# Altium PCB AX301_AX4010.PcbDoc (part 7 of 10)
Units mm, origin at the board's own origin, x right, y up, seen from the top; angles counter-clockwise.
Board outline 131.7 x 91.8 mm, 4 copper layers (Top Layer, GND, Mid-Layer 1, Bottom Layer); 191 components, 338 nets, 1108 pads, 420 vias.
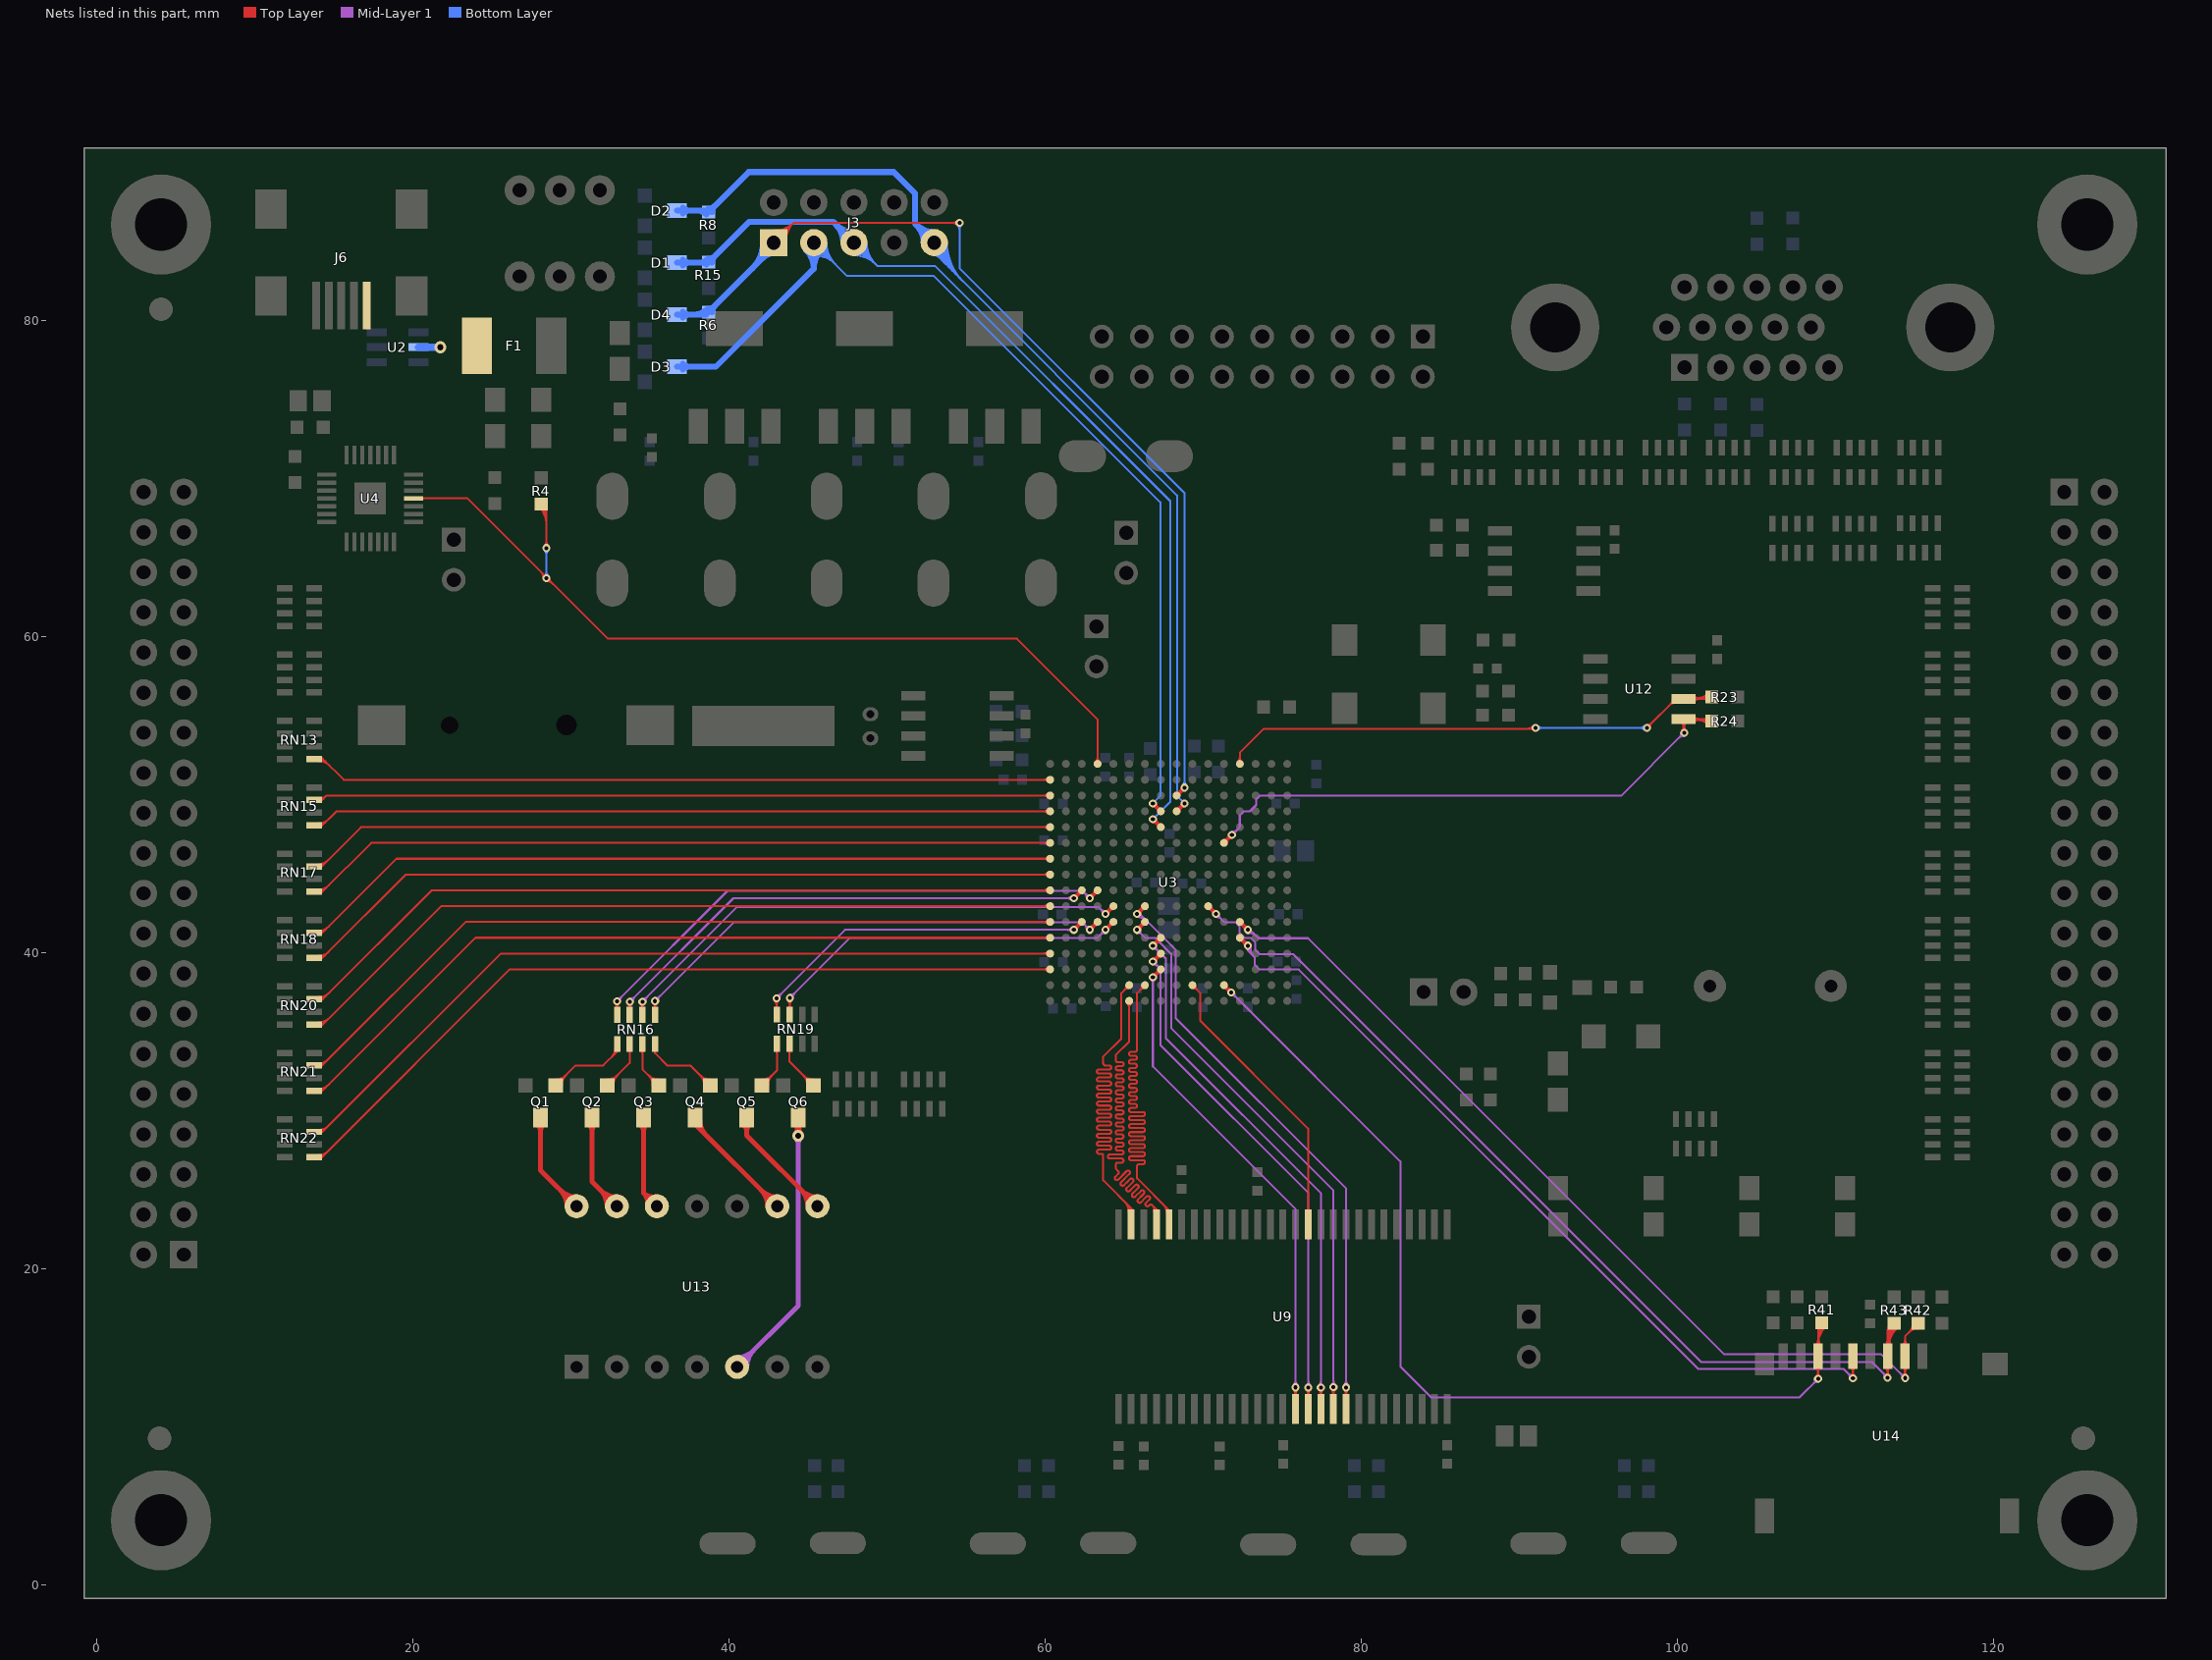
[diagram p9: the nets of this part, all layers, seen from the top]

## Via types
v1: diameter 0.508, hole 0.254, Top Layer to Bottom Layer, 377 vias
v2: diameter 0.762, hole 0.381, Top Layer to Bottom Layer, 41 vias
v3: diameter 1.016, hole 0.508, Top Layer to Bottom Layer, 2 vias

## Nets (pads, with @x,y where several pads share a name; then routed paths per layer and width w, separated by ;. In a path a pad name is that pad's centre, name@x,y a point inside that pad or via, vN(x,y) a via of type N, cw(c..) or ccw(c..) an arc to the next point about the centre after c; other vN are vias at no path point) (continued)
S_DB13: U3.K15 U9.50 | length 35.9
  Top Layer w0.127: U3.K15@66.132,37.925 cw(c65.681,37.925) 66,37.606 cw(c66.318,37.288) U3.K15@66.318,37.738 ; U3.K15@66.318,37.925 65.811,37.418 65.811,33.833 cw(c65.684,33.833) 65.684,33.706 65.433,33.706 ccw(c65.433,33.579) 65.306,33.579 ccw(c65.433,33.579) 65.433,33.452 65.684,33.452 cw(c65.684,33.325) 65.811,33.325 cw(c65.684,33.325) 65.684,33.198 65.433,33.198 ccw(c65.433,33.071) 65.306,33.071 ccw(c65.433,33.071) 65.433,32.944 65.684,32.944 cw(c65.684,32.817) 65.811,32.817 cw(c65.684,32.817) 65.684,32.69 65.433,32.69 ccw(c65.433,32.563) 65.306,32.563 ccw(c65.433,32.563) 65.433,32.436 65.684,32.436 cw(c65.684,32.309) 65.811,32.309 cw(c65.684,32.309) 65.684,32.182 65.433,32.182 ccw(c65.433,32.055) 65.306,32.055 ccw(c65.433,32.055) 65.433,31.928 65.684,31.928 cw(c65.684,31.801) 65.811,31.801 cw(c65.684,31.801) 65.684,31.674 65.433,31.674 ccw(c65.433,31.547) 65.306,31.547 ccw(c65.433,31.547) 65.433,31.42 65.684,31.42 cw(c65.684,31.293) 65.811,31.293 cw(c65.684,31.293) 65.684,31.166 65.433,31.166 ccw(c65.433,31.039) 65.306,31.039 ccw(c65.433,31.039) 65.433,30.912 65.684,30.912 cw(c65.684,30.785) 65.811,30.785 cw(c65.684,30.785) 65.684,30.658 65.433,30.658 ccw(c65.433,30.531) 65.306,30.531 ccw(c65.433,30.531) 65.433,30.404 65.684,30.404 cw(c65.684,30.277) 65.811,30.277 cw(c65.684,30.277) 65.684,30.15 65.433,30.15 ccw(c65.433,30.023) 65.306,30.023 ccw(c65.433,30.023) 65.433,29.896 66.189,29.896 cw(c66.189,29.769) 66.316,29.769 cw(c66.189,29.769) 66.189,29.642 65.433,29.642 ccw(c65.433,29.515) 65.306,29.515 ccw(c65.433,29.515) 65.433,29.388 66.189,29.388 cw(c66.189,29.261) 66.316,29.261 cw(c66.189,29.261) 66.189,29.134 65.433,29.134 ccw(c65.433,29.007) 65.306,29.007 ccw(c65.433,29.007) 65.433,28.88 66.189,28.88 cw(c66.189,28.753) 66.316,28.753 cw(c66.189,28.753) 66.189,28.626 65.433,28.626 ccw(c65.433,28.499) 65.306,28.499 ccw(c65.433,28.499) 65.433,28.372 66.189,28.372 cw(c66.189,28.245) 66.316,28.245 cw(c66.189,28.245) 66.189,28.118 65.433,28.118 ccw(c65.433,27.991) 65.306,27.991 ccw(c65.433,27.991) 65.433,27.864 66.189,27.864 cw(c66.189,27.737) 66.316,27.737 cw(c66.189,27.737) 66.189,27.61 65.433,27.61 ccw(c65.433,27.483) 65.306,27.483 ccw(c65.433,27.483) 65.433,27.356 66.189,27.356 cw(c66.189,27.229) 66.316,27.229 cw(c66.189,27.229) 66.189,27.102 65.433,27.102 ccw(c65.433,26.975) 65.306,26.975 ccw(c65.433,26.975) 65.433,26.848 66.189,26.848 cw(c66.189,26.721) 66.316,26.721 cw(c66.189,26.721) 66.189,26.594 65.938,26.594 ccw(c65.938,26.467) 65.811,26.467 65.811,25.705 U9.50@67.843,23.673 ; 67.475,24.041 cw(c66.954,23.52) U9.50@67.691,23.52 ; 67.692,23.825 cw(c67.387,23.52) U9.50@67.818,23.52 ; U9.50@67.843,22.784 U9.50@67.843,23.673 ; U9.50@67.869,23.647 U9.50@67.843,23.673
S_DB14: U3.L16 U9.51 | length 36
  Top Layer w0.127: U3.L16@65.186,36.793 cw(c64.868,36.474) 65.318,36.474 cw(c65.768,36.474) U3.L16@65.45,36.793 ; U3.L16@65.318,36.925 65.318,34.355 64.465,33.503 64.465,33.172 ccw(c64.592,33.172) 64.592,33.045 64.841,33.045 cw(c64.841,32.918) 64.968,32.918 cw(c64.841,32.918) 64.841,32.791 64.592,32.791 ccw(c64.592,32.664) 64.465,32.664 ccw(c64.592,32.664) 64.592,32.537 64.841,32.537 cw(c64.841,32.41) 64.968,32.41 cw(c64.841,32.41) 64.841,32.283 64.592,32.283 ccw(c64.592,32.156) 64.465,32.156 ccw(c64.592,32.156) 64.592,32.029 64.841,32.029 cw(c64.841,31.902) 64.968,31.902 cw(c64.841,31.902) 64.841,31.775 64.592,31.775 ccw(c64.592,31.648) 64.465,31.648 ccw(c64.592,31.648) 64.592,31.521 64.841,31.521 cw(c64.841,31.394) 64.968,31.394 cw(c64.841,31.394) 64.841,31.267 64.592,31.267 ccw(c64.592,31.14) 64.465,31.14 ccw(c64.592,31.14) 64.592,31.013 64.841,31.013 cw(c64.841,30.886) 64.968,30.886 cw(c64.841,30.886) 64.841,30.759 64.592,30.759 ccw(c64.592,30.632) 64.465,30.632 ccw(c64.592,30.632) 64.592,30.505 64.841,30.505 cw(c64.841,30.378) 64.968,30.378 cw(c64.841,30.378) 64.841,30.251 64.592,30.251 ccw(c64.592,30.124) 64.465,30.124 ccw(c64.592,30.124) 64.592,29.997 64.841,29.997 cw(c64.841,29.87) 64.968,29.87 cw(c64.841,29.87) 64.841,29.743 64.592,29.743 ccw(c64.592,29.616) 64.465,29.616 ccw(c64.592,29.616) 64.592,29.489 64.841,29.489 cw(c64.841,29.362) 64.968,29.362 cw(c64.841,29.362) 64.841,29.235 64.592,29.235 ccw(c64.592,29.108) 64.465,29.108 ccw(c64.592,29.108) 64.592,28.981 64.841,28.981 cw(c64.841,28.854) 64.968,28.854 cw(c64.841,28.854) 64.841,28.727 64.592,28.727 ccw(c64.592,28.6) 64.465,28.6 ccw(c64.592,28.6) 64.592,28.473 64.841,28.473 cw(c64.841,28.346) 64.968,28.346 cw(c64.841,28.346) 64.841,28.219 64.592,28.219 ccw(c64.592,28.092) 64.465,28.092 ccw(c64.592,28.092) 64.592,27.965 64.841,27.965 cw(c64.841,27.838) 64.968,27.838 cw(c64.841,27.838) 64.841,27.711 64.592,27.711 ccw(c64.592,27.584) 64.465,27.584 ccw(c64.592,27.584) 64.592,27.457 64.841,27.457 cw(c64.841,27.33) 64.968,27.33 cw(c64.841,27.33) 64.841,27.203 64.09,27.203 ccw(c64.09,27.076) 63.963,27.076 ccw(c64.09,27.076) 64.09,26.949 64.841,26.949 cw(c64.841,26.822) 64.968,26.822 cw(c64.841,26.822) 64.841,26.695 64.592,26.695 ccw(c64.592,26.568) 64.465,26.568 64.465,26.314 64.621,26.158 cw(c64.532,26.068) 64.621,25.979 64.446,25.803 ccw(c64.535,25.713) 64.446,25.623 ccw(c64.535,25.713) 64.625,25.623 65.156,26.154 cw(c65.246,26.065) 65.336,26.154 cw(c65.246,26.065) 65.336,25.975 64.805,25.444 ccw(c64.895,25.354) 64.805,25.264 ccw(c64.895,25.354) 64.984,25.264 65.25,25.53 65.366,25.645 cw(c65.455,25.556) 65.545,25.645 cw(c65.455,25.556) 65.545,25.466 65.164,25.084 ccw(c65.254,24.995) 65.164,24.905 ccw(c65.254,24.995) 65.344,24.905 65.609,25.17 65.704,25.265 cw(c65.794,25.176) 65.884,25.265 cw(c65.794,25.176) 65.884,25.086 65.789,24.991 65.523,24.725 ccw(c65.613,24.635) 65.523,24.546 ccw(c65.613,24.635) 65.703,24.546 66.063,24.906 cw(c66.153,24.816) 66.243,24.906 cw(c66.153,24.816) 66.243,24.727 66.148,24.632 65.882,24.366 ccw(c65.972,24.276) 65.882,24.186 ccw(c65.972,24.276) 66.062,24.186 66.328,24.452 66.423,24.547 cw(c66.512,24.457) 66.602,24.547 cw(c66.512,24.457) 66.602,24.367 66.382,24.147 ccw(c66.472,24.057) 66.382,23.968 ccw(c66.472,24.057) 66.562,23.968 66.597,24.003 cw(c66.687,23.913) 66.777,24.003 ; U9.51@66.896,23.56 ccw(c66.452,23.678) 66.777,24.003 ; 66.932,23.847 cw(c66.698,23.612) U9.51@67.018,23.527 ; U9.51@66.984,23.661 ccw(c66.948,23.749) 67.043,23.749 ; 67.031,23.749 66.777,24.003 ; U9.51@67.043,22.784 67.043,23.749 ; U9.51@67.102,23.661 cw(c67.138,23.749) 67.043,23.749
S_DB15: U3.L15 U9.53 | length 35.7
  Top Layer w0.127: 64.976,24.279 cw(c64.217,23.52) U9.53@65.291,23.52 ; U3.L15@65.132,37.925 cw(c64.681,37.925) 65,37.606 cw(c65.318,37.288) U3.L15@65.318,37.738 ; 65.193,24.063 cw(c64.651,23.52) U9.53@65.418,23.52 ; U3.L15@65.318,37.925 64.821,37.427 64.821,34.544 63.678,33.401 63.678,32.969 ccw(c63.805,32.969) 63.805,32.842 64.057,32.842 cw(c64.057,32.715) 64.184,32.715 cw(c64.057,32.715) 64.057,32.588 63.4,32.588 ccw(c63.4,32.461) 63.273,32.461 ccw(c63.4,32.461) 63.4,32.334 64.057,32.334 cw(c64.057,32.207) 64.184,32.207 cw(c64.057,32.207) 64.057,32.08 63.4,32.08 ccw(c63.4,31.953) 63.273,31.953 ccw(c63.4,31.953) 63.4,31.826 64.057,31.826 cw(c64.057,31.699) 64.184,31.699 cw(c64.057,31.699) 64.057,31.572 63.4,31.572 ccw(c63.4,31.445) 63.273,31.445 ccw(c63.4,31.445) 63.4,31.318 64.057,31.318 cw(c64.057,31.191) 64.184,31.191 cw(c64.057,31.191) 64.057,31.064 63.4,31.064 ccw(c63.4,30.937) 63.273,30.937 ccw(c63.4,30.937) 63.4,30.81 64.057,30.81 cw(c64.057,30.683) 64.184,30.683 cw(c64.057,30.683) 64.057,30.556 63.4,30.556 ccw(c63.4,30.429) 63.273,30.429 ccw(c63.4,30.429) 63.4,30.302 64.057,30.302 cw(c64.057,30.175) 64.184,30.175 cw(c64.057,30.175) 64.057,30.048 63.4,30.048 ccw(c63.4,29.921) 63.273,29.921 ccw(c63.4,29.921) 63.4,29.794 64.057,29.794 cw(c64.057,29.667) 64.184,29.667 cw(c64.057,29.667) 64.057,29.54 63.4,29.54 ccw(c63.4,29.413) 63.273,29.413 ccw(c63.4,29.413) 63.4,29.286 64.057,29.286 cw(c64.057,29.159) 64.184,29.159 cw(c64.057,29.159) 64.057,29.032 63.4,29.032 ccw(c63.4,28.905) 63.273,28.905 ccw(c63.4,28.905) 63.4,28.778 64.057,28.778 cw(c64.057,28.651) 64.184,28.651 cw(c64.057,28.651) 64.057,28.524 63.4,28.524 ccw(c63.4,28.397) 63.273,28.397 ccw(c63.4,28.397) 63.4,28.27 64.057,28.27 cw(c64.057,28.143) 64.184,28.143 cw(c64.057,28.143) 64.057,28.016 63.4,28.016 ccw(c63.4,27.889) 63.273,27.889 ccw(c63.4,27.889) 63.4,27.762 64.057,27.762 cw(c64.057,27.635) 64.184,27.635 cw(c64.057,27.635) 64.057,27.508 63.4,27.508 ccw(c63.4,27.381) 63.273,27.381 ccw(c63.4,27.381) 63.4,27.254 63.551,27.254 cw(c63.551,27.127) 63.678,27.127 63.678,25.578 U9.53@65.557,23.698 ; 65.41,23.846 cw(c65.084,23.52) U9.53@65.545,23.52
S_DQM0: U3.J14 U9.15 | length 35.4
  Top Layer w0.152: v1@75.719,12.346 cw(c75.419,12.046) U9.15@75.843,12.046 ; U9.15@75.744,11.935 ccw(c75.506,12.174) 75.843,12.174 ccw(c76.18,12.174) U9.15@75.942,11.935 ; U9.15@75.843,11.1 75.843,12.47 v1(75.844,12.471) ; U9.15@75.843,12.039 cw(c76.277,12.039) v1@75.97,12.346
  Top Layer w0.254: v1(66.818,38.425) U3.J14@67.318,38.925 ; v1@66.818,38.552 ccw(c66.818,38.858) 67.035,38.641 ccw(c67.252,38.425) v1@66.945,38.425 ; U3.J14@67.195,38.925 cw(c66.898,38.925) 67.108,38.715 cw(c67.318,38.505) U3.J14@67.318,38.802
  Mid-Layer 1 w0.127: v1@66.683,38.29 cw(c66.358,37.965) 66.818,37.965 cw(c67.278,37.965) v1@66.953,38.29 ; v1(66.818,38.425) 66.818,32.775 75.844,23.749 v1(75.844,12.471) ; v1@75.71,12.606 ccw(c75.384,12.931) 75.844,12.931 ccw(c76.304,12.931) v1@75.979,12.606
S_DQM1: U3.G15 U9.39 | length 19.5
  Top Layer w0.127: U3.G15@69.318,37.738 cw(c69.318,37.288) 69.636,37.606 cw(c69.955,37.925) U3.G15@69.504,37.925 ; U3.G15@69.318,37.925 69.825,37.418 69.825,35.662 76.643,28.843 U9.39@76.643,22.784 ; U9.39@76.535,23.628 ccw(c76.275,23.888) 76.643,23.888 ccw(c77.011,23.888) U9.39@76.751,23.628
S_NCAS: U3.J12 U9.17 | length 38
  Top Layer w0.152: v1@77.319,12.33 cw(c77.019,12.031) U9.17@77.443,12.031 ; U9.17@77.344,11.935 ccw(c77.106,12.174) 77.443,12.174 ccw(c77.78,12.174) U9.17@77.542,11.935 ; U9.17@77.443,11.1 77.443,12.455 v1(77.445,12.456) ; U9.17@77.443,12.023 cw(c77.878,12.023) v1@77.57,12.33
  Top Layer w0.254: v1(66.818,40.425) U3.J12@67.318,40.925 ; v1@66.818,40.552 ccw(c66.818,40.858) 67.035,40.641 ccw(c67.252,40.425) v1@66.945,40.425 ; U3.J12@67.195,40.925 cw(c66.898,40.925) 67.108,40.715 cw(c67.318,40.505) U3.J12@67.318,40.802
  Mid-Layer 1 w0.127: v1@66.818,40.234 cw(c66.818,39.774) 67.143,40.099 cw(c67.468,40.425) v1@67.008,40.425 ; v1(66.818,40.425) 67.64,39.602 67.64,34.569 77.445,24.765 v1(77.445,12.456) ; v1@77.31,12.591 ccw(c76.985,12.916) 77.445,12.916 ccw(c77.905,12.916) v1@77.579,12.591
S_NCS: U3.K10 U9.19 | length 41.7
  Top Layer w0.152: v1@78.917,12.344 cw(c78.614,12.04) 79.043,12.04 cw(c79.472,12.04) v1@79.169,12.344 ; U9.19@78.944,11.935 ccw(c78.706,12.174) 79.043,12.174 ccw(c79.38,12.174) U9.19@79.142,11.935 ; U9.19@79.043,11.1 v1(79.043,12.47)
  Top Layer w0.254: v1(65.818,42.425) U3.K10@66.318,42.925 ; v1@65.818,42.552 ccw(c65.818,42.858) 66.035,42.641 ccw(c66.252,42.425) v1@65.945,42.425 ; U3.K10@66.195,42.925 cw(c65.898,42.925) 66.108,42.715 cw(c66.318,42.505) U3.K10@66.318,42.802
  Mid-Layer 1 w0.127: v1@65.818,42.234 cw(c65.818,41.315) 66.468,41.965 ; v1@65.818,42.361 cw(c65.818,41.749) 66.251,42.182 ; v1(65.818,42.425) 66.008,42.425 68.275,40.157 68.275,35.814 79.043,25.046 v1(79.043,12.47) ; v1@78.908,12.604 ccw(c78.583,12.93) 79.043,12.93 ccw(c79.503,12.93) v1@79.178,12.604
S_NRAS: U3.K11 U9.18 | length 40.1
  Top Layer w0.152: v1@78.117,12.357 cw(c77.814,12.053) 78.243,12.053 cw(c78.672,12.053) v1@78.369,12.357 ; U9.18@78.144,11.935 ccw(c77.906,12.174) 78.243,12.174 ccw(c78.58,12.174) U9.18@78.342,11.935 ; U9.18@78.243,11.1 v1(78.243,12.482)
  Top Layer w0.254: v1(65.818,41.425) U3.K11@66.318,41.925 ; v1@65.818,41.552 ccw(c65.818,41.858) 66.035,41.641 ccw(c66.252,41.425) v1@65.945,41.425 ; U3.K11@66.195,41.925 cw(c65.898,41.925) 66.108,41.715 cw(c66.318,41.505) U3.K11@66.318,41.802
  Mid-Layer 1 w0.127: v1@65.818,41.234 cw(c65.818,40.774) 66.143,41.099 cw(c66.468,41.425) v1@66.008,41.425 ; v1(65.818,41.425) 66.323,40.919 66.954,40.919 67.97,39.903 67.97,35.204 78.243,24.932 v1(78.243,12.482) ; v1@78.108,12.617 ccw(c77.783,12.942) 78.243,12.942 ccw(c78.703,12.942) v1@78.378,12.617
S_NWE: U3.J13 U9.16 | length 36.7
  Top Layer w0.152: v1@76.531,12.33 cw(c76.262,12.061) 76.643,12.061 ; U9.16@76.544,11.935 ccw(c76.306,12.174) 76.643,12.174 ccw(c76.98,12.174) U9.16@76.742,11.935 ; U9.16@76.643,11.1 76.643,12.442 v1(76.657,12.456) ; U9.16@76.643,11.993 cw(c77.121,11.993) v1@76.783,12.33
  Top Layer w0.254: v1(66.818,39.425) U3.J13@67.318,39.925 ; v1@66.818,39.552 ccw(c66.818,39.858) 67.035,39.641 ccw(c67.252,39.425) v1@66.945,39.425 ; U3.J13@67.195,39.925 cw(c66.898,39.925) 67.108,39.715 cw(c67.318,39.505) U3.J13@67.318,39.802
  Mid-Layer 1 w0.127: v1@66.818,39.234 cw(c66.818,38.774) 67.143,39.099 cw(c67.468,39.425) v1@67.008,39.425 ; v1(66.818,39.425) 67.285,38.958 67.285,34.138 76.657,24.765 v1(76.657,12.456) ; v1@76.522,12.591 ccw(c76.197,12.916) 76.657,12.916 ccw(c77.117,12.916) v1@76.792,12.591
SCL: R23.2 U3.D1 U12.6 | length 41.6
  Top Layer w0.127: U3.D1@72.186,52.056 ccw(c71.868,52.375) 72.318,52.375 ccw(c72.768,52.375) U3.D1@72.45,52.056 ; U3.D1@72.318,51.925 72.318,52.633 73.838,54.153 v1@91.034,54.153 ; 90.451,54.153 ccw(c90.451,54.786) v1@90.899,54.338 ; 90.696,54.153 cw(c90.696,53.866) v1@90.899,54.069 ; 90.758,54.153 ccw(c90.758,54.48) v1@90.989,54.249 ; v1(98.069,54.204) 99.898,56.032 U12.6@100.406,56.032 R23.2@102.184,56.032 ; v1@98.069,54.394 ccw(c98.069,54.854) 98.395,54.529 ccw(c98.72,54.204) v1@98.26,54.204 ; 99.45,55.585 cw(c99.949,55.086) U12.6@99.949,55.791 ; 99.573,55.707 ccw(c99.248,56.032) U12.6@99.708,56.032 ; U12.6@99.667,55.801 cw(c99.949,55.52) U12.6@99.949,55.918 ; U12.6@100.935,56.122 ccw(c101.127,56.361) 101.187,56.06 ; U12.6@101.014,56.221 ccw(c101.348,56.637) 101.454,56.114 ; U12.6@101.034,55.862 cw(c101.446,55.45) 101.446,56.032 cw(c101.446,56.615) U12.6@101.034,56.203 ; U12.6@101.05,56.032 ccw(c101.05,57.294) R23.2@101.942,56.402 ; U12.6@101.064,55.899 cw(c101.445,55.646) 101.354,56.094 ; 101.356,56.032 ccw(c101.356,56.987) R23.2@102.032,56.312 ; R23.2@101.942,55.917 ccw(c101.663,55.638) 101.663,56.032 ccw(c101.663,56.681) R23.2@102.121,56.222
  Bottom Layer w0.127: v1(91.034,54.204) v1(98.069,54.204) ; v1@91.168,54.069 cw(c91.494,53.744) 91.494,54.204 cw(c91.494,54.664) v1@91.168,54.338 ; v1@97.935,54.069 ccw(c97.609,53.744) 97.609,54.204 ccw(c97.609,54.664) v1@97.935,54.338
SD_CLK: U3.D12 U14.5 | length 57.6
  Top Layer w0.127: U14.5@110.941,13.781 cw(c110.538,13.377) 111.109,13.377 cw(c111.68,13.377) U14.5@111.276,13.781 ; v1@110.974,13.181 ccw(c110.649,13.507) 111.109,13.507 ccw(c111.568,13.507) v1@111.243,13.181 ; v1(111.109,13.047) U14.5@111.109,14.448
  Top Layer w0.254: U3.D12@72.318,40.802 cw(c72.318,40.505) 72.528,40.715 cw(c72.738,40.925) U3.D12@72.441,40.925 ; U3.D12@72.318,40.925 v1(72.818,40.425) ; v1@72.691,40.425 ccw(c72.384,40.425) 72.601,40.641 ccw(c72.818,40.858) v1@72.818,40.552
  Mid-Layer 1 w0.127: v1@72.735,40.253 cw(c72.669,40.12) 72.818,40.12 ; v1@72.755,40.432 ccw(c73.221,40.38) 72.889,40.049 ; v1(72.818,40.425) 72.818,40.12 ; v1@72.881,40.418 ccw(c73.557,40.342) 73.076,39.862 ; v1@72.901,40.253 ccw(c72.967,40.12) 72.818,40.12 ; v1@73.007,40.404 ccw(c73.893,40.305) 73.263,39.675 ; v1@110.918,13.047 ccw(c110.458,13.047) 110.783,13.372 ccw(c111.109,13.697) v1@111.109,13.237 ; v1(111.109,13.047) 110.515,13.64 101.321,13.64 76.048,38.913 73.558,38.913 73.263,39.208 73.263,39.675 ; 72.818,40.12 73.263,39.675
SD_DIN: R43.2 U3.F10 U14.3 | length 73.5
  Top Layer w0.127: U14.3@113.141,13.781 cw(c112.738,13.377) 113.309,13.377 cw(c113.88,13.377) U14.3@113.476,13.781 ; U14.3@113.141,15.115 ccw(c112.738,15.519) 113.309,15.519 ccw(c113.88,15.519) U14.3@113.476,15.115 ; U14.3@113.17,15.139 ccw(c112.86,15.565) 113.38,15.483 ; v1@113.174,13.215 ccw(c112.849,13.54) 113.309,13.54 ccw(c113.769,13.54) v1@113.443,13.215 ; U14.3@113.179,15.146 ccw(c112.781,15.754) 113.493,15.606 ; U14.3@113.249,15.04 ccw(c113.018,15.392) 113.43,15.306 ; v1(113.309,13.08) U14.3@113.309,14.448 113.309,16.128 ; U14.3@113.309,14.725 cw(c115.527,14.725) R43.2@113.958,16.293 ; U14.3@113.309,15.031 cw(c115.22,15.031) R43.2@113.868,16.383 ; 113.309,15.338 cw(c114.913,15.338) R43.2@113.779,16.473 ; 113.309,15.644 cw(c114.607,15.644) R43.2@113.689,16.562 ; 113.309,15.951 cw(c114.3,15.951) R43.2@113.599,16.652 ; R43.2@113.387,16.438 cw(c113.088,16.349) 113.309,16.128 ; 113.39,15.545 ccw(c113.998,15.449) U14.3@113.5,15.087 ; 113.448,15.389 ccw(c113.854,15.304) U14.3@113.507,15.077 ; R43.2@113.618,16.207 ccw(c113.529,15.908) 113.309,16.128 ; R43.2@113.716,16.535 113.309,16.128
  Top Layer w0.254: U3.F10@70.318,42.802 cw(c70.318,42.505) 70.528,42.715 cw(c70.738,42.925) U3.F10@70.441,42.925 ; U3.F10@70.318,42.925 v1(70.818,42.425) ; v1@70.691,42.425 ccw(c70.384,42.425) 70.601,42.641 ccw(c70.818,42.858) v1@70.818,42.552
  Mid-Layer 1 w0.127: v1@70.818,42.234 cw(c70.818,41.774) 71.143,42.099 cw(c71.468,42.425) v1@71.009,42.425 ; v1(70.818,42.425) 71.333,41.91 72.034,41.91 72.288,41.656 72.288,41.25 72.619,40.919 73,40.919 73.279,40.64 73.279,40.183 73.584,39.878 75.717,39.878 101.524,14.072 112.317,14.072 v1(113.309,13.08) ; v1@113.118,13.08 ccw(c112.658,13.08) 112.983,13.405 ccw(c113.309,13.731) v1@113.309,13.271
SD_DOUT: R41.2 U3.E15 U14.7 | length 71.4
  Top Layer w0.127: U3.E15@71.318,37.738 cw(c71.318,37.288) 71.636,37.606 cw(c71.955,37.925) U3.E15@71.505,37.925 ; U3.E15@71.318,37.925 v1(71.78,37.462) ; U3.E15@71.408,37.738 cw(c71.225,37.421) v1@71.59,37.448 ; U3.E15@71.505,37.834 ccw(c71.822,38.018) v1@71.795,37.652 ; 71.519,37.674 ccw(c71.659,37.917) v1@71.731,37.646 ; 71.568,37.724 cw(c71.326,37.584) v1@71.596,37.512 ; v1@71.59,37.462 ccw(c71.13,37.462) 71.455,37.787 ccw(c71.78,38.113) v1@71.78,37.653 ; U14.7@108.741,13.781 cw(c108.338,13.377) 108.909,13.377 cw(c109.48,13.377) U14.7@109.076,13.781 ; U14.7@108.741,15.115 ccw(c108.338,15.519) 108.909,15.519 ccw(c109.48,15.519) U14.7@109.076,15.115 ; U14.7@108.767,15.137 ccw(c108.488,15.51) 108.949,15.444 ; v1@108.774,13.146 ccw(c108.449,13.471) 108.909,13.471 ccw(c109.369,13.471) v1@109.043,13.146 ; v1(108.909,13.011) U14.7@108.909,14.448 108.909,16.326 R41.2@109.144,16.561 ; U14.7@108.909,15.165 cw(c110.539,15.165) R41.2@109.386,16.318 ; 108.909,15.472 cw(c110.233,15.472) R41.2@109.296,16.408 ; 108.909,15.778 cw(c109.926,15.778) R41.2@109.207,16.498 ; 108.909,16.085 cw(c109.62,16.085) R41.2@109.117,16.588 ; 108.921,15.25 ccw(c109.202,15.21) U14.7@108.99,15.021 ; 108.96,15.52 ccw(c109.467,15.447) U14.7@109.085,15.106
  Mid-Layer 1 w0.127: v1@71.78,37.272 cw(c71.78,36.812) 72.106,37.137 cw(c72.431,37.462) v1@71.971,37.462 ; v1(71.78,37.462) 82.474,26.769 82.474,13.792 84.43,11.836 107.734,11.836 v1(108.909,13.011) ; v1@108.718,13.011 cw(c108.258,13.011) 108.583,12.686 cw(c108.909,12.361) v1@108.909,12.821
SD_NCS: R42.2 U3.D11 U14.2 | length 65.3
  Top Layer w0.127: U14.2@114.241,13.781 cw(c113.838,13.377) 114.409,13.377 cw(c114.98,13.377) U14.2@114.576,13.781 ; U14.2@114.241,15.115 ccw(c113.838,15.519) 114.409,15.519 ccw(c114.98,15.519) U14.2@114.576,15.115 ; v1@114.274,13.197 ccw(c113.949,13.523) 114.409,13.523 ccw(c114.869,13.523) v1@114.543,13.197 ; v1(114.409,13.063) U14.2@114.409,14.448 114.409,15.704 R42.2@115.24,16.535 ; R42.2@114.897,16.535 cw(c114.069,16.535) 114.654,15.95 cw(c115.24,15.365) R42.2@115.24,16.192 ; R42.2@115.024,16.535 cw(c114.503,16.535) 114.871,16.167 cw(c115.24,15.798) R42.2@115.24,16.319
  Top Layer w0.254: U3.D11@72.318,41.802 cw(c72.318,41.505) 72.528,41.715 cw(c72.738,41.925) U3.D11@72.441,41.925 ; U3.D11@72.318,41.925 v1(72.818,41.425) ; v1@72.691,41.425 ccw(c72.384,41.425) 72.601,41.641 ccw(c72.818,41.858) v1@72.818,41.552
  Mid-Layer 1 w0.127: v1@72.818,41.234 cw(c72.818,40.39) 73.415,40.987 ; v1@72.818,41.361 cw(c72.818,40.824) 73.198,41.204 ; v1(72.818,41.425) 72.977,41.425 73.508,40.894 76.632,40.894 102.946,14.58 112.892,14.58 v1(114.409,13.063) ; v1@114.218,13.063 ccw(c113.758,13.063) 114.083,13.388 ccw(c114.409,13.713) v1@114.409,13.253
SDA: R24.2 U3.E6 U12.5 | length 44.8
  Top Layer w0.127: U12.5@100.236,54.592 cw(c99.762,54.119) v1@100.432,54.119 ; v1@100.289,54.025 ccw(c100.019,54.265) 100.367,54.358 ; v1@100.297,54.034 ccw(c99.972,54.359) 100.432,54.359 ccw(c100.892,54.359) v1@100.566,54.034 ; U12.5@100.325,54.682 cw(c100.069,54.425) 100.432,54.425 ; 100.403,54.225 ccw(c100.66,54.294) v1@100.527,54.064 ; U12.5@100.406,54.762 102.057,54.762 R24.2@102.184,54.635 ; v1(100.432,53.899) U12.5@100.432,54.737 ; 100.432,54.241 cw(c100.927,54.241) U12.5@100.577,54.592 ; U12.5@100.935,54.673 cw(c101.127,54.434) 101.187,54.735 ; U12.5@101.014,54.574 cw(c101.348,54.158) 101.454,54.681 ; U12.5@101.034,54.592 cw(c101.446,54.18) 101.446,54.762 cw(c101.446,55.345) U12.5@101.034,54.933 ; U12.5@101.05,54.762 cw(c101.05,53.501) R24.2@101.942,54.393 ; U12.5@101.064,54.896 ccw(c101.445,55.148) 101.354,54.701 ; 101.356,54.762 cw(c101.356,53.808) R24.2@102.032,54.483 ; R24.2@101.942,54.878 cw(c101.663,55.157) 101.663,54.762 cw(c101.663,54.114) R24.2@102.121,54.573
  Top Layer w0.254: U3.E6@71.318,46.925 v1(71.818,47.425) ; U3.E6@71.318,47.048 ccw(c71.318,47.345) 71.528,47.135 ccw(c71.738,46.925) U3.E6@71.441,46.925 ; v1@71.691,47.425 cw(c71.384,47.425) 71.601,47.208 cw(c71.818,46.991) v1@71.818,47.298
  Mid-Layer 1 w0.127: v1(71.818,47.425) 72.314,47.92 72.314,48.666 72.568,48.92 72.949,48.92 73.355,49.327 73.355,49.682 73.584,49.911 96.444,49.911 v1(100.432,53.899) ; v1@71.818,47.615 ccw(c71.818,48.075) 72.143,47.75 ccw(c72.468,47.425) v1@72.009,47.425 ; v1@100.241,53.899 cw(c99.781,53.899) 100.106,53.574 cw(c100.432,53.248) v1@100.432,53.708
SEL0: RN16.8 U3.N9 | length 38.8
  Top Layer w0.127: v1@32.784,36.771 cw(c32.458,36.446) 32.918,36.446 cw(c33.378,36.446) v1@33.053,36.771 ; RN16.8@32.822,36.443 ccw(c32.589,36.676) 32.918,36.676 ccw(c33.248,36.676) RN16.8@33.015,36.443 ; v1@32.834,36.736 cw(c32.747,36.56) 32.936,36.611 cw(c33.035,36.637) v1@32.994,36.731 ; v1@32.843,36.731 cw(c32.802,36.637) 32.901,36.611 cw(c33.09,36.56) v1@33.003,36.736 ; RN16.8@32.918,36.046 v1(32.918,36.906)
  Top Layer w0.254: v1(62.818,43.425) U3.N9@63.318,43.925 ; v1@62.818,43.552 ccw(c62.818,43.858) 63.035,43.641 ccw(c63.252,43.425) v1@62.945,43.425 ; U3.N9@63.195,43.925 cw(c62.898,43.925) 63.108,43.715 cw(c63.318,43.505) U3.N9@63.318,43.802
  Mid-Layer 1 w0.127: v1(32.918,36.906) 39.903,43.891 62.351,43.891 v1(62.818,43.425) ; v1@32.918,37.097 ccw(c32.918,37.557) 33.244,37.231 ccw(c33.569,36.906) v1@33.109,36.906 ; v1@62.627,43.425 ccw(c62.168,43.425) 62.493,43.75 ccw(c62.818,44.075) v1@62.818,43.615
SEL0_T: Q1.1 RN16.1 | length 8.6
  Top Layer w0.127: Q1.1@29.032,31.572 30.302,32.842 32.029,32.842 32.918,33.731 RN16.1@32.918,34.188 ; Q1.1@29.032,31.839 ccw(c29.032,32.483) 29.487,32.027 ccw(c29.943,31.572) Q1.1@29.299,31.572 ; Q1.1@29.032,31.966 ccw(c29.032,32.916) 29.704,32.244 ccw(c30.376,31.572) Q1.1@29.426,31.572 ; 32.574,33.387 ccw(c32.073,33.888) RN16.1@32.782,33.888 ; 32.791,33.604 ccw(c32.506,33.888) RN16.1@32.909,33.888
SEL0_TT: Q1.3 U13.14 | length 10
  Top Layer w0.305: Q1.3@27.851,29.147 cw(c27.331,28.627) 28.067,28.627 cw(c28.803,28.627) Q1.3@28.283,29.147 ; Q1.3@28.067,29.54 28.067,26.213 U13.14@30.353,23.927 ; U13.14@29.743,23.927 ccw(c28.272,23.927) 29.312,24.967 ccw(c30.353,26.008) U13.14@30.353,24.536
SEL1: RN16.7 U3.P9 | length 36.5
  Top Layer w0.127: v1@33.584,36.733 cw(c33.258,36.408) 33.718,36.408 cw(c34.178,36.408) v1@33.853,36.733 ; RN16.7@33.622,36.443 ccw(c33.389,36.676) 33.718,36.676 ccw(c34.048,36.676) RN16.7@33.815,36.443 ; v1@33.648,36.691 cw(c33.618,36.616) 33.697,36.594 cw(c33.831,36.558) v1@33.783,36.689 ; v1@33.653,36.689 cw(c33.606,36.558) 33.74,36.594 cw(c33.819,36.616) v1@33.789,36.691 ; RN16.7@33.718,36.046 v1(33.718,36.868)
  Top Layer w0.254: v1(61.818,43.425) U3.P9@62.318,43.925 ; v1@61.818,43.552 ccw(c61.818,43.858) 62.035,43.641 ccw(c62.252,43.425) v1@61.945,43.425 ; U3.P9@62.195,43.925 cw(c61.898,43.925) 62.108,43.715 cw(c62.318,43.505) U3.P9@62.318,43.802
  Mid-Layer 1 w0.127: v1(33.718,36.868) 40.275,43.425 v1(61.818,43.425) ; v1@33.718,37.059 ccw(c33.718,37.519) 34.044,37.193 ccw(c34.369,36.868) v1@33.909,36.868 ; v1@61.683,43.29 ccw(c61.358,42.965) 61.358,43.425 ccw(c61.358,43.884) v1@61.683,43.559
SEL1_T: Q2.1 RN16.2 | length 6.2
  Top Layer w0.127: Q2.1@32.294,31.572 33.718,32.997 RN16.2@33.718,34.188 ; Q2.1@32.294,31.839 ccw(c32.294,32.483) 32.749,32.027 ccw(c33.204,31.572) Q2.1@32.56,31.572 ; Q2.1@32.294,31.966 ccw(c32.294,32.916) 32.966,32.244 ccw(c33.638,31.572) Q2.1@32.687,31.572 ; RN16.2@33.622,33.792 cw(c33.389,33.559) 33.718,33.559 cw(c34.048,33.559) RN16.2@33.815,33.792
SEL1_TT: Q2.3 U13.13 | length 9.7
  Top Layer w0.305: Q2.3@31.113,29.147 cw(c30.593,28.627) 31.328,28.627 cw(c32.064,28.627) Q2.3@31.544,29.147 ; Q2.3@31.328,29.54 31.328,25.491 U13.13@32.893,23.927 ; U13.13@32.283,23.927 ccw(c30.812,23.927) 31.852,24.967 ccw(c32.893,26.008) U13.13@32.893,24.536
SEL2: RN16.6 U3.M10 | length 37.7
  Top Layer w0.127: v1@34.384,36.746 cw(c34.058,36.421) 34.518,36.421 cw(c34.978,36.421) v1@34.653,36.746 ; RN16.6@34.422,36.443 ccw(c34.189,36.676) 34.518,36.676 ccw(c34.848,36.676) RN16.6@34.615,36.443 ; RN16.6@34.518,36.046 v1(34.518,36.881) ; v1@34.59,36.704 ccw(c34.649,36.559) 34.498,36.6 ccw(c34.413,36.623) 34.446,36.704 cw(c34.388,36.559) 34.539,36.6 cw(c34.624,36.623) v1@34.591,36.704
  Top Layer w0.254: v1(63.818,42.425) U3.M10@64.318,42.925 ; v1@63.818,42.552 ccw(c63.818,42.858) 64.035,42.641 ccw(c64.252,42.425) v1@63.945,42.425 ; U3.M10@64.195,42.925 cw(c63.898,42.925) 64.108,42.715 cw(c64.318,42.505) U3.M10@64.318,42.802
  Mid-Layer 1 w0.127: v1(34.518,36.881) 40.513,42.875 63.367,42.875 v1(63.818,42.425) ; v1@34.518,37.071 ccw(c34.518,37.531) 34.844,37.206 ccw(c35.169,36.881) v1@34.709,36.881 ; v1@63.627,42.425 ccw(c63.168,42.425) 63.493,42.75 ccw(c63.818,43.075) v1@63.818,42.615
SEL2_T: Q3.1 RN16.3 | length 6.1
  Top Layer w0.127: RN16.3@34.422,33.792 cw(c34.189,33.559) 34.518,33.559 cw(c34.848,33.559) RN16.3@34.615,33.792 ; RN16.3@34.518,34.188 34.518,32.609 Q3.1@35.555,31.572 ; Q3.1@35.161,31.572 ccw(c34.211,31.572) 34.883,32.244 ccw(c35.555,32.916) Q3.1@35.555,31.966 ; Q3.1@35.288,31.572 ccw(c34.644,31.572) 35.1,32.027 ccw(c35.555,32.483) Q3.1@35.555,31.839
SEL2_TT: Q3.3 U13.12 | length 8.7
  Top Layer w0.305: Q3.3@34.374,29.147 cw(c33.854,28.627) 34.59,28.627 cw(c35.326,28.627) Q3.3@34.805,29.147 ; Q3.3@34.59,29.54 34.59,24.77 ; U13.12@34.831,24.024 ccw(c33.981,24.161) 34.59,24.77 ; U13.12@35.336,24.529 cw(c35.199,25.379) 34.59,24.77 ; U13.12@35.433,23.927 34.59,24.77
SEL3: RN16.5 U3.N11 | length 35.6
  Top Layer w0.127: v1@35.184,36.784 cw(c34.858,36.459) 35.318,36.459 cw(c35.778,36.459) v1@35.453,36.784 ; RN16.5@35.222,36.443 ccw(c34.989,36.676) 35.318,36.676 ccw(c35.648,36.676) RN16.5@35.415,36.443 ; v1@35.228,36.751 cw(c35.125,36.56) 35.334,36.616 cw(c35.44,36.645) v1@35.396,36.744 ; v1@35.241,36.744 cw(c35.197,36.645) 35.302,36.616 cw(c35.512,36.56) v1@35.409,36.751 ; RN16.5@35.318,36.046 v1(35.318,36.919)
  Top Layer w0.254: v1(62.818,41.425) U3.N11@63.318,41.925 ; v1@62.818,41.552 ccw(c62.818,41.858) 63.035,41.641 ccw(c63.252,41.425) v1@62.945,41.425 ; U3.N11@63.195,41.925 cw(c62.898,41.925) 63.108,41.715 cw(c63.318,41.505) U3.N11@63.318,41.802
  Mid-Layer 1 w0.127: v1(35.318,36.919) 40.31,41.91 62.333,41.91 v1(62.818,41.425) ; v1@35.318,37.109 ccw(c35.318,37.569) 35.644,37.244 ccw(c35.969,36.919) v1@35.509,36.919 ; v1@62.627,41.425 ccw(c62.168,41.425) 62.493,41.75 ccw(c62.818,42.075) v1@62.818,41.615
SEL3_T: Q4.1 RN16.4 | length 7.8
  Top Layer w0.127: RN16.4@35.237,33.779 cw(c35.117,33.617) 35.318,33.617 ; RN16.4@35.318,34.188 35.318,33.617 ; RN16.4@35.4,33.779 ccw(c35.52,33.617) 35.318,33.617 ; Q4.1@38.423,31.572 ccw(c37.472,31.572) 38.144,32.244 ccw(c38.816,32.916) Q4.1@38.816,31.966 ; Q4.1@38.55,31.572 ccw(c37.906,31.572) 38.361,32.027 ccw(c38.816,32.483) Q4.1@38.816,31.839 ; Q4.1@38.816,31.572 37.556,32.832 36.104,32.832 35.318,33.617
SEL3_TT: Q4.3 U13.9 | length 11.1
  Top Layer w0.305: Q4.3@37.851,29.54 37.851,29.129 U13.9@43.053,23.927 ; Q4.3@38.156,29.362 ccw(c39.456,29.362) 38.537,28.443 ; U13.9@42.443,23.927 ccw(c40.972,23.927) 42.012,24.967 ccw(c43.053,26.008) U13.9@43.053,24.536
SEL4: RN19.8 U3.P11 | length 25.9
  Top Layer w0.127: v1@42.867,36.949 cw(c42.542,36.624) 43.002,36.624 cw(c43.462,36.624) v1@43.137,36.949 ; RN19.8@42.931,36.468 ccw(c42.759,36.64) 43.002,36.64 ; RN19.8@43.002,36.097 v1(43.002,37.084) ; 43.002,36.763 ccw(c43.418,36.763) RN19.8@43.124,36.468
  Top Layer w0.254: v1(61.818,41.425) U3.P11@62.318,41.925 ; v1@61.818,41.552 ccw(c61.818,41.858) 62.035,41.641 ccw(c62.252,41.425) v1@61.945,41.425 ; U3.P11@62.195,41.925 cw(c61.898,41.925) 62.108,41.715 cw(c62.318,41.505) U3.P11@62.318,41.802
  Mid-Layer 1 w0.127: v1(43.002,37.084) 47.343,41.425 v1(61.818,41.425) ; v1@43.002,37.274 ccw(c43.002,37.734) 43.327,37.409 ccw(c43.653,37.084) v1@43.193,37.084 ; v1@61.683,41.29 ccw(c61.358,40.965) 61.358,41.425 ccw(c61.358,41.884) v1@61.683,41.559
SEL4_T: Q5.1 RN19.1 | length 6.1
  Top Layer w0.127: Q5.1@42.078,31.572 43.028,32.522 RN19.1@43.028,34.214 ; Q5.1@42.078,31.839 ccw(c42.078,32.483) 42.533,32.027 ccw(c42.988,31.572) Q5.1@42.344,31.572 ; Q5.1@42.078,31.966 ccw(c42.078,32.916) 42.75,32.244 ccw(c43.422,31.572) Q5.1@42.471,31.572 ; RN19.1@42.931,33.817 cw(c42.698,33.584) 43.028,33.584 cw(c43.357,33.584) RN19.1@43.124,33.817
SEL4_TT: Q5.3 U13.8 | length 10.9
  Top Layer w0.305: Q5.3@40.897,29.147 cw(c40.377,28.627) 41.112,28.627 cw(c41.848,28.627) Q5.3@41.328,29.147 ; Q5.3@41.112,29.54 41.112,28.407 U13.8@45.593,23.927 ; U13.8@44.983,23.927 ccw(c43.512,23.927) 44.552,24.967 ccw(c45.593,26.008) U13.8@45.593,24.536
SEL5: RN19.7 U3.M11 | length 27.1
  Top Layer w0.127: v1@43.706,36.975 cw(c43.38,36.649) 43.84,36.649 cw(c44.3,36.649) v1@43.975,36.975 ; RN19.7@43.731,36.468 ccw(c43.467,36.732) 43.84,36.732 ; RN19.7@43.84,36.085 v1(43.84,37.109) ; 43.84,36.67 ccw(c44.126,36.67) RN19.7@43.924,36.468
  Top Layer w0.254: v1(63.818,41.425) U3.M11@64.318,41.925 ; v1@63.818,41.552 ccw(c63.818,41.858) 64.035,41.641 ccw(c64.252,41.425) v1@63.945,41.425 ; U3.M11@64.195,41.925 cw(c63.898,41.925) 64.108,41.715 cw(c64.318,41.505) U3.M11@64.318,41.802
  Mid-Layer 1 w0.127: v1(43.84,37.109) 47.65,40.919 63.313,40.919 v1(63.818,41.425) ; v1@43.84,37.3 ccw(c43.84,37.76) 44.166,37.435 ccw(c44.491,37.109) v1@44.031,37.109 ; v1@63.627,41.425 cw(c63.168,41.425) 63.493,41.099 cw(c63.818,40.774) v1@63.818,41.234
SEL5_T: Q6.1 RN19.2 | length 6.3
  Top Layer w0.127: RN19.2@43.731,33.817 cw(c43.498,33.584) 43.828,33.584 cw(c44.157,33.584) RN19.2@43.924,33.817 ; RN19.2@43.828,34.214 43.828,33.084 Q6.1@45.339,31.572 ; Q6.1@44.945,31.572 ccw(c43.995,31.572) 44.667,32.244 ccw(c45.339,32.916) Q6.1@45.339,31.966 ; Q6.1@45.072,31.572 ccw(c44.428,31.572) 44.884,32.027 ccw(c45.339,32.483) Q6.1@45.339,31.839
SEL5_TT: Q6.3 U13.5 | length 23.9
  Top Layer w0.305: Q6.3@44.158,29.147 cw(c43.638,28.627) 44.374,28.627 cw(c45.11,28.627) Q6.3@44.589,29.147 ; v2@44.26,28.595 ccw(c44.085,28.898) 44.422,28.807 ; 44.302,28.895 cw(c43.965,28.805) 44.212,28.559 ccw(c43.822,28.949) 44.374,28.949 ccw(c44.926,28.949) 44.535,28.559 cw(c44.783,28.805) 44.446,28.895 ; 44.325,28.807 ccw(c44.663,28.898) v2@44.488,28.595 ; v2(44.374,28.397) Q6.3@44.374,29.54
  Mid-Layer 1 w0.305: U13.5@40.513,13.767 44.374,17.628 v2(44.374,28.397) ; U13.5@40.513,14.376 ccw(c40.513,15.848) 41.554,14.807 ccw(c42.594,13.767) U13.5@41.123,13.767 ; v2@44.212,28.236 cw(c43.822,27.845) 44.374,27.845 cw(c44.926,27.845) v2@44.535,28.236
T2: RN13.5 U3.T2 | length 49.7
  Top Layer w0.127: RN13.5@13.745,52.242 14.3,52.242 ; RN13.5@14.045,52.105 cw(c14.045,51.16) 14.714,51.828 ; RN13.5@14.045,52.232 cw(c14.045,51.594) 14.497,52.045 ; RN13.5@14.045,52.359 cw(c14.045,52.027) 14.28,52.262 ; RN13.5@14.159,52.166 cw(c14.3,52.072) 14.3,52.242 ; RN13.5@14.159,52.317 ccw(c14.3,52.412) 14.3,52.242 ; U3.T2@60.186,50.793 ccw(c59.868,50.474) 59.868,50.925 ccw(c59.868,51.375) U3.T2@60.186,51.056 ; U3.T2@60.318,50.925 15.617,50.925 14.3,52.242
T3: RN15.7 U3.T3 | length 48.5
  Top Layer w0.127: RN15.7@13.745,49.641 14.259,49.641 ; RN15.7@14.047,49.651 ccw(c14.111,50.011) 14.37,49.752 ; RN15.7@14.069,49.776 ccw(c14.163,50.304) 14.542,49.925 ; RN15.7@14.169,49.584 cw(c14.259,49.542) 14.259,49.641 ; RN15.7@14.169,49.699 ccw(c14.259,49.74) 14.259,49.641 ; U3.T3@60.186,49.793 ccw(c59.868,49.474) 59.868,49.925 ccw(c59.868,50.375) U3.T3@60.186,50.056 ; U3.T3@60.318,49.925 14.542,49.925 ; 14.259,49.641 14.542,49.925
T4: RN15.5 U3.T4 | length 49.1
  Top Layer w0.127: RN15.5@13.745,48.041 14.275,48.041 ; RN15.5@14.045,48.051 ccw(c14.045,48.628) 14.453,48.22 ; RN15.5@14.045,48.178 ccw(c14.045,49.062) 14.67,48.437 ; RN15.5@14.165,47.976 cw(c14.275,47.916) 14.275,48.041 ; RN15.5@14.165,48.106 ccw(c14.275,48.166) 14.275,48.041 ; U3.T4@60.186,48.793 ccw(c59.868,48.474) 59.868,48.925 ccw(c59.868,49.375) U3.T4@60.186,49.056 ; U3.T4@60.318,48.925 15.158,48.925 14.275,48.041
T5: RN17.7 U3.T5 | length 49.3
  Top Layer w0.127: RN17.7@13.745,45.441 14.224,45.441 16.708,47.925 U3.T5@60.318,47.925 ; RN17.7@14.045,45.45 ccw(c14.045,45.905) 14.367,45.583 ; RN17.7@14.045,45.577 ccw(c14.045,46.339) 14.584,45.8 ; U3.T5@60.186,47.793 ccw(c59.868,47.474) 59.868,47.925 ccw(c59.868,48.375) U3.T5@60.186,48.056
T6: RN17.5 U3.T6 | length 50
  Top Layer w0.127: RN17.5@13.745,43.841 14.275,43.841 ; RN17.5@14.045,43.85 ccw(c14.045,44.427) 14.453,44.019 ; RN17.5@14.045,43.977 ccw(c14.045,44.861) 14.67,44.236 ; RN17.5@14.165,43.776 cw(c14.275,43.716) 14.275,43.841 ; RN17.5@14.165,43.906 ccw(c14.275,43.966) 14.275,43.841 ; U3.T6@60.186,46.793 ccw(c59.868,46.474) 59.868,46.925 ccw(c59.868,47.375) U3.T6@60.186,47.056 ; U3.T6@60.318,46.925 17.359,46.925 14.275,43.841
T7: RN18.7 U3.T7 | length 50.4
  Top Layer w0.127: RN18.7@13.945,41.24 14.275,41.24 ; RN18.7@14.045,41.25 ccw(c14.045,41.827) 14.453,41.419 ; RN18.7@14.045,41.377 ccw(c14.045,42.26) 14.67,41.636 ; RN18.7@14.165,41.175 cw(c14.275,41.115) 14.275,41.24 ; RN18.7@14.165,41.305 ccw(c14.275,41.365) 14.275,41.24 ; U3.T7@60.186,45.793 ccw(c59.868,45.474) 59.868,45.925 ccw(c59.868,46.375) U3.T7@60.186,46.056 ; U3.T7@60.318,45.925 18.959,45.925 14.275,41.24
T8: RN18.5 U3.T8 | length 50.9
  Top Layer w0.127: RN18.5@13.745,39.64 14.275,39.64 ; RN18.5@14.045,39.65 ccw(c14.045,40.227) 14.453,39.819 ; RN18.5@14.045,39.777 ccw(c14.045,40.66) 14.67,40.036 ; RN18.5@14.165,39.575 cw(c14.275,39.515) 14.275,39.64 ; RN18.5@14.165,39.705 ccw(c14.275,39.765) 14.275,39.64 ; U3.T8@60.186,44.793 ccw(c59.868,44.474) 59.868,44.925 ccw(c59.868,45.375) U3.T8@60.186,45.056 ; U3.T8@60.318,44.925 19.559,44.925 14.275,39.64
T9: RN20.7 U3.T9 | length 52
  Top Layer w0.127: RN20.7@13.745,37.04 14.3,37.04 ; RN20.7@14.045,36.922 ccw(c14.045,37.254) 14.28,37.019 ; RN20.7@14.045,37.049 ccw(c14.045,37.688) 14.497,37.236 ; RN20.7@14.045,37.176 ccw(c14.045,38.121) 14.714,37.453 ; RN20.7@14.159,36.964 cw(c14.3,36.87) 14.3,37.04 ; RN20.7@14.159,37.115 ccw(c14.3,37.21) 14.3,37.04 ; U3.T9@60.186,43.793 ccw(c59.868,43.474) 59.868,43.925 ccw(c59.868,44.375) U3.T9@60.186,44.056 ; U3.T9@60.318,43.925 21.185,43.925 14.3,37.04
T10: RN20.5 U3.T10 | length 52.2
  Top Layer w0.127: RN20.5@13.745,35.44 14.3,35.44 ; RN20.5@14.045,35.322 ccw(c14.045,35.654) 14.28,35.419 ; RN20.5@14.045,35.449 ccw(c14.045,36.088) 14.497,35.636 ; RN20.5@14.045,35.576 ccw(c14.045,36.521) 14.714,35.853 ; RN20.5@14.159,35.364 cw(c14.3,35.27) 14.3,35.44 ; RN20.5@14.159,35.515 ccw(c14.3,35.61) 14.3,35.44 ; U3.T10@60.186,42.793 ccw(c59.868,42.474) 59.868,42.925 ccw(c59.868,43.375) U3.T10@60.186,43.056 ; U3.T10@60.318,42.925 21.785,42.925 14.3,35.44
T11: RN21.7 U3.T11 | length 52.3
  Top Layer w0.127: RN21.7@13.745,32.839 14.249,32.839 ; RN21.7@14.045,32.849 ccw(c14.045,33.365) 14.41,33 ; RN21.7@14.045,32.976 ccw(c14.045,33.798) 14.627,33.217 ; RN21.7@14.171,32.787 cw(c14.249,32.755) 14.249,32.839 ; RN21.7@14.171,32.891 ccw(c14.249,32.924) 14.249,32.839 ; U3.T11@60.186,41.793 ccw(c59.868,41.474) 59.868,41.925 ccw(c59.868,42.375) U3.T11@60.186,42.056 ; U3.T11@60.318,41.925 23.335,41.925 14.249,32.839
T12: RN21.5 U3.T12 | length 52.7
  Top Layer w0.127: RN21.5@13.745,31.239 14.275,31.239 ; RN21.5@14.045,31.249 ccw(c14.045,31.826) 14.453,31.418 ; RN21.5@14.045,31.376 ccw(c14.045,32.259) 14.67,31.634 ; RN21.5@14.165,31.174 cw(c14.275,31.114) 14.275,31.239 ; RN21.5@14.165,31.304 ccw(c14.275,31.364) 14.275,31.239 ; U3.T12@60.186,40.793 ccw(c59.868,40.474) 59.868,40.925 ccw(c59.868,41.375) U3.T12@60.186,41.056 ; U3.T12@60.318,40.925 23.96,40.925 14.275,31.239
T13: RN22.7 U3.T13 | length 53.4
  Top Layer w0.127: RN22.7@13.745,28.639 14.275,28.639 ; RN22.7@14.045,28.648 ccw(c14.045,29.225) 14.453,28.817 ; RN22.7@14.045,28.775 ccw(c14.045,29.659) 14.67,29.034 ; RN22.7@14.165,28.573 cw(c14.275,28.514) 14.275,28.639 ; RN22.7@14.165,28.704 ccw(c14.275,28.763) 14.275,28.639 ; U3.T13@60.186,39.793 ccw(c59.868,39.474) 59.868,39.925 ccw(c59.868,40.375) U3.T13@60.186,40.056 ; U3.T13@60.318,39.925 25.561,39.925 14.275,28.639
T14: RN22.5 U3.T14 | length 53.5
  Top Layer w0.127: RN22.5@13.745,27.039 14.249,27.039 ; RN22.5@14.045,27.048 ccw(c14.045,27.564) 14.41,27.199 ; RN22.5@14.045,27.175 ccw(c14.045,27.998) 14.627,27.416 ; RN22.5@14.171,26.986 cw(c14.249,26.954) 14.249,27.039 ; RN22.5@14.171,27.091 ccw(c14.249,27.123) 14.249,27.039 ; U3.T14@60.186,38.793 ccw(c59.868,38.474) 59.868,38.925 ccw(c59.868,39.375) U3.T14@60.186,39.056 ; U3.T14@60.318,38.925 26.135,38.925 14.249,27.039
TCK: D4.3 J3.1 R6.2 U3.H3 | length 80.2
  Top Layer w0.127: J3.1@42.824,84.912 44.069,86.157 ; J3.1@42.853,85.33 ccw(c42.907,86.133) 43.476,85.564 ccw(c44.045,84.995) J3.1@43.243,84.941 ; J3.1@42.861,85.457 ccw(c42.933,86.503) 43.674,85.762 ccw(c44.415,85.02) J3.1@43.369,84.949 ; J3.1@42.87,85.584 ccw(c42.958,86.873) 43.871,85.959 ccw(c44.785,85.046) J3.1@43.496,84.958 ; J3.1@42.879,85.71 ccw(c42.983,87.243) 44.069,86.157 ; J3.1@43.623,84.967 cw(c45.155,85.071) 44.069,86.157 ; v1@54.45,86.022 ccw(c54.125,85.697) 54.125,86.157 ccw(c54.125,86.617) v1@54.45,86.292 ; v1(54.585,86.157) 44.069,86.157
  Top Layer w0.254: U3.H3@68.318,49.925 v1(68.818,50.425) ; U3.H3@68.318,50.048 ccw(c68.318,50.345) 68.528,50.135 ccw(c68.738,49.925) U3.H3@68.441,49.925 ; v1@68.691,50.425 cw(c68.384,50.425) 68.601,50.208 cw(c68.818,49.991) v1@68.818,50.298
  Bottom Layer w0.127: v1@54.45,86.022 cw(c54.125,85.697) 54.585,85.697 cw(c55.045,85.697) v1@54.719,86.022 ; v1(54.585,86.157) 54.585,83.287 68.818,69.053 v1(68.818,50.425) ; v1@68.683,50.559 ccw(c68.358,50.885) 68.818,50.885 ccw(c69.278,50.885) v1@68.953,50.559
  Bottom Layer w0.381: D4.3@36.703,80.357 38.549,80.357 R6.2@38.71,80.518 42.816,84.624 42.824,84.624 J3.1@42.824,84.912 ; D4.3@37.069,80.169 cw(c37.525,79.713) 37.525,80.357 cw(c37.525,81.001) D4.3@37.069,80.546 ; 37.8,80.357 ccw(c37.8,81.428) R6.2@38.557,80.671 ; R6.2@38.71,80.734 ccw(c38.71,81.255) 39.078,80.887 ccw(c39.447,80.518) R6.2@38.925,80.518 ; 41.478,83.286 ccw(c39.852,84.912) J3.1@42.151,84.912 ; 42.128,83.937 ccw(c41.153,84.912) J3.1@42.532,84.912 ; 42.152,83.961 cw(c42.824,83.289) J3.1@42.824,84.239
TDI: D2.3 J3.9 R8.2 U3.H4 | length 84.5
  Top Layer w0.254: U3.H4@68.318,48.925 v1(68.818,49.425) ; U3.H4@68.318,49.048 ccw(c68.318,49.345) 68.528,49.135 ccw(c68.738,48.925) U3.H4@68.441,48.925 ; v1@68.691,49.425 cw(c68.384,49.425) 68.601,49.208 cw(c68.818,48.991) v1@68.818,49.298
  Bottom Layer w0.127: J3.9@52.895,84.912 ccw(c54.214,84.912) 53.282,83.98 ; J3.9@52.984,84.112 cw(c52.984,83.714) 53.266,83.995 ; J3.9@52.984,84.912 52.984,84.277 68.351,68.91 68.351,49.891 v1(68.818,49.425) ; J3.9@53.023,84.912 ccw(c54.648,84.912) 53.498,83.763 ; J3.9@53.149,84.912 ccw(c55.081,84.912) 53.715,83.546 ; J3.9@53.276,84.912 ccw(c55.515,84.912) 53.932,83.33 ; J3.9@53.404,84.912 ccw(c55.948,84.912) 54.149,83.113 ; J3.9@53.53,84.912 ccw(c56.382,84.912) 54.366,82.896 ; J3.9@53.657,84.912 ccw(c56.816,84.912) 54.582,82.679 ; J3.9@53.785,84.912 ccw(c57.249,84.912) 54.799,82.462
  Bottom Layer w0.381: D2.3@36.703,86.944 38.71,86.944 R8.2@38.71,86.843 41.25,89.383 50.419,89.383 51.765,88.036 51.765,86.131 J3.9@52.984,84.912 ; D2.3@37.069,86.756 cw(c37.525,86.3) 37.525,86.944 cw(c37.525,87.588) D2.3@37.069,87.133 ; 37.943,86.944 cw(c37.943,86.076) R8.2@38.557,86.69 ; R8.2@38.71,87.058 ccw(c38.71,87.58) 39.078,87.211 ccw(c39.447,86.843) R8.2@38.925,86.843 ; J3.9@52.311,84.912 ccw(c50.686,84.912) 51.835,86.061 ccw(c52.984,87.21) J3.9@52.984,85.585
TDO: D3.3 J3.3 U3.J4 | length 75.3
  Top Layer w0.254: v1@66.818,49.298 cw(c66.818,48.991) 67.035,49.208 cw(c67.252,49.425) v1@66.945,49.425 ; v1(66.818,49.425) U3.J4@67.318,48.925 ; U3.J4@67.195,48.925 ccw(c66.898,48.925) 67.108,49.135 ccw(c67.318,49.345) U3.J4@67.318,49.048
  Bottom Layer w0.127: J3.3@45.364,84.112 cw(c45.364,82.18) 46.73,83.546 cw(c48.096,84.912) J3.3@46.164,84.912 ; J3.3@45.364,84.239 cw(c45.364,82.614) 46.513,83.763 cw(c47.663,84.912) J3.3@46.038,84.912 ; J3.3@45.364,84.366 cw(c45.364,83.048) 46.297,83.98 cw(c47.229,84.912) J3.3@45.91,84.912 ; J3.3@45.364,84.493 cw(c45.364,83.481) 46.08,84.197 cw(c46.795,84.912) J3.3@45.783,84.912 ; J3.3@45.364,84.912 47.473,82.804 52.959,82.804 67.285,68.478 67.285,49.891 v1(66.818,49.425)
  Bottom Layer w0.381: D3.3@36.703,77.064 39.167,77.064 45.364,83.261 J3.3@45.364,84.912 ; D3.3@37.069,76.875 cw(c37.525,76.42) 37.525,77.064 cw(c37.525,77.707) D3.3@37.069,77.252 ; J3.3@44.888,84.436 cw(c43.739,83.287) 45.364,83.287 cw(c46.989,83.287) J3.3@45.84,84.436
TMS: D1.3 J3.5 R15.2 U3.J5 | length 76.3
  Top Layer w0.254: v1@66.818,48.298 cw(c66.818,47.991) 67.035,48.208 cw(c67.252,48.425) v1@66.945,48.425 ; v1(66.818,48.425) U3.J5@67.318,47.925 ; U3.J5@67.195,47.925 ccw(c66.898,47.925) 67.108,48.135 ccw(c67.318,48.345) U3.J5@67.318,48.048
  Bottom Layer w0.127: J3.5@47.904,84.112 cw(c47.904,82.18) 49.27,83.546 cw(c50.636,84.912) J3.5@48.704,84.912 ; J3.5@47.904,84.239 cw(c47.904,82.614) 49.053,83.763 cw(c50.203,84.912) J3.5@48.578,84.912 ; J3.5@47.904,84.366 cw(c47.904,83.048) 48.837,83.98 cw(c49.769,84.912) J3.5@48.45,84.912 ; J3.5@47.904,84.493 cw(c47.904,83.481) 48.62,84.197 cw(c49.335,84.912) J3.5@48.323,84.912 ; J3.5@47.904,84.912 49.378,83.439 53.035,83.439 67.92,68.555 67.92,49.526 v1(66.818,48.425)
  Bottom Layer w0.381: D1.3@36.703,83.651 38.693,83.651 R15.2@38.71,83.668 41.275,86.233 46.584,86.233 J3.5@47.904,84.912 ; D1.3@37.069,83.462 cw(c37.525,83.007) 37.525,83.651 cw(c37.525,84.295) D1.3@37.069,83.839 ; 38.147,83.651 ccw(c38.147,84.23) R15.2@38.557,83.82 ; 38.229,83.651 cw(c38.229,83.187) R15.2@38.557,83.515 ; R15.2@38.71,83.883 ccw(c38.71,84.405) 39.078,84.036 ccw(c39.447,83.668) R15.2@38.925,83.668 ; J3.5@47.231,84.912 ccw(c45.606,84.912) 46.755,86.061 ccw(c47.904,87.21) J3.5@47.904,85.585
TXD: R4.1 U3.N1 U4.25 | length 66.8
  Top Layer w0.127: U4.25@20.046,68.726 23.451,68.726 32.334,59.842 58.217,59.842 63.318,54.741 U3.N1@63.318,51.925 ; U4.25@20.562,68.675 cw(c20.684,68.553) 20.684,68.726 cw(c20.684,68.898) U4.25@20.562,68.776 ; R4.1@27.875,68.345 cw(c26.493,66.963) 28.448,66.963 ; R4.1@27.965,68.435 cw(c26.799,67.269) 28.448,67.269 ; R4.1@28.055,68.525 cw(c27.106,67.576) 28.448,67.576 ; 28.087,64.09 cw(c27.675,63.678) v1@28.258,63.678 ; R4.1@28.118,68.588 28.448,68.257 v1(28.448,65.583) ; R4.1@28.145,68.615 cw(c27.413,67.882) 28.448,67.882 ; 28.21,63.967 ccw(c28.448,64.206) v1@28.448,63.868 ; R4.1@28.235,68.704 cw(c27.719,68.189) R4.1@28.448,68.189 ; v1@28.313,65.718 ccw(c27.988,66.043) 28.448,66.043 ccw(c28.908,66.043) v1@28.583,65.718 ; v1@28.448,63.487 cw(c28.448,62.905) 28.86,63.317 ; v1@28.639,63.678 ccw(c28.976,63.678) 28.737,63.439 ; U3.N1@63.186,52.056 ccw(c62.868,52.375) 63.318,52.375 ccw(c63.768,52.375) U3.N1@63.45,52.056
  Bottom Layer w0.127: v1@28.313,63.813 ccw(c27.988,64.138) 28.448,64.138 ccw(c28.908,64.138) v1@28.583,63.813 ; v1@28.313,65.448 cw(c27.988,65.123) 28.448,65.123 cw(c28.908,65.123) v1@28.583,65.448 ; v1(28.448,63.678) v1(28.448,65.583)
VBUS: F1.1 J6.1 U2.5 | length 1.4
  Bottom Layer w0.483: U2.5@20.345,78.293 v2(21.732,78.293)